# EAGLE board WSTL18P1 (EAGLE 7.7.0)
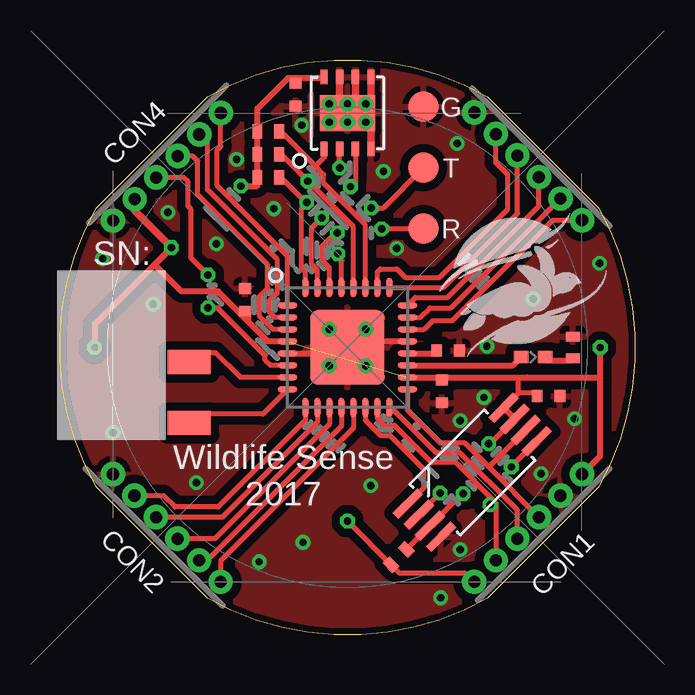
[diagram p0: board, top side]
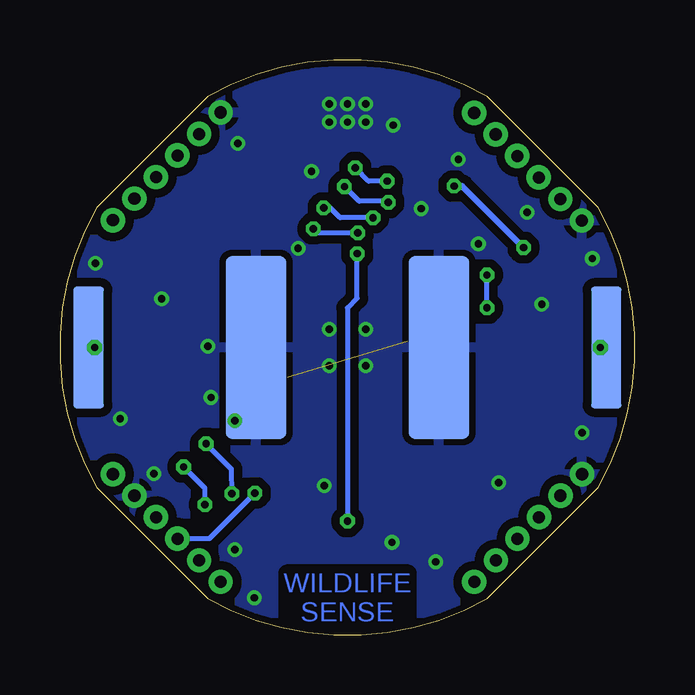
[diagram p1: board, bottom side, seen from below]

Size 23.98 x 23.98 mm. Coordinates in mm from the lower left corner, seen from the top.
Outline: 6.15,1.52 1.52,6.15 arc-59 1.52,17.83 6.15,22.45 arc-59 17.83,22.45 22.45,17.83 arc-59 22.45,6.15 17.83,1.52 arc-59 6.15,1.52
Copper layers (1*16): Top 0.035mm / dielectric 1.5mm / Bottom 0.035mm
Design rules "Nikos-SeeedStudio_2layer_DRU_no_angle_20140221": minimum track width 6mil, minimum drill 12mil, track to track 6mil, track to pad 6mil, pad to pad 6mil, via to via 6mil, smd to smd 0mil, copper to edge 10mil, drill to drill 10mil, minimum pad ring 10mil, minimum via ring 6mil, stop-mask expansion 0mil, vias tented up to drill 100mil, thermal gap 10mil
Net classes: 1 GND: width 0.254 mm, drill 0.305 mm, clearance 0.356 mm; 2 Signal: width 0.203 mm, drill 0.305 mm, clearance 0.203 mm

## Footprints (pad centres in the part's own frame; a part is rotated, then mirrored left to right if it is on the bottom)
CR2032-LINX-M = smd 1.27 x 5.08: BATT1 -10.795,0; BATT2 10.795,0 | smd 2.54 x 7.62: GND 3.81,0; GND1 -3.81,0
CAP_0402 = smd 0.45 x 0.5: 1 -0.475,0; 2 0.475,0
1X6_1.27_ROUND = drill 0.508 pad 0.813: 1 0,0; 2 1.27,0; 3 2.54,0; 4 3.81,0; 5 5.08,0; 6 6.35,0
LED_0402 = smd 0.6 x 0.5: ANODE -0.5,0; CATHODE 0.5,0
ATMEGA328PB_VFQFN32 = smd 0.8 x 0.25: 1 -2.5,1.75; 2 -2.5,1.25; 3 -2.5,0.75; 4 -2.5,0.25; 5 -2.5,-0.25; 6 -2.5,-0.75; 7 -2.5,-1.25; 8 -2.5,-1.75; 17 2.5,-1.75; 18 2.5,-1.25; 19 2.5,-0.75; 20 2.5,-0.25; 21 2.5,0.25; 22 2.5,0.75; 23 2.5,1.25; 24 2.5,1.75 | smd 0.25 x 0.8: 9 -1.75,-2.5; 10 -1.25,-2.5; 11 -0.75,-2.5; 12 -0.25,-2.5; 13 0.25,-2.5; 14 0.75,-2.5; 15 1.25,-2.5; 16 1.75,-2.5; 25 1.75,2.5; 26 1.25,2.5; 27 0.75,2.5; 28 0.25,2.5; 29 -0.25,2.5; 30 -0.75,2.5; 31 -1.25,2.5; 32 -1.75,2.5 | smd 3.1 x 3.1: PAD 0,0
TSSSOP-8 = smd 1.45 x 0.35: 1 -2.825,0.975; 2 -2.825,0.325; 3 -2.825,-0.325; 4 -2.825,-0.975; 5 2.825,-0.975; 6 2.825,-0.325; 7 2.825,0.325; 8 2.825,0.975
RES_0402 = smd 0.4 x 0.6: 1 -0.45,0; 2 0.45,0
ABS07AIG = smd 1.8 x 1: P$1 0,1.275; P$2 0,-1.275
MAX30205_TDFN8 = smd 0.6 x 0.3: 1 -1.5,0.975; 2 -1.5,0.325; 3 -1.5,-0.325; 4 -1.5,-0.975; 5 1.5,-0.975; 6 1.5,-0.325; 7 1.5,0.325; 8 1.5,0.975 | smd 1.5 x 2.3: PAD 0,0
3_PIN_0.1INCH_POGO_PADS = smd 1.27 x 1.27: 1 0,0; 2 -2.54,0; 3 -5.08,0

## Placement (x,y rotation side)
BAT  LINX-CR2032-BAT-HLD-001-M  [CR2032-LINX-M]  11.99,11.99 0 bottom
C1  0.1uF  [CAP_0402]  7.72,13.97 90 top
C2  0.1uF  [CAP_0402]  15.93,10.16 270 top
C3  0.1uF  [CAP_0402]  16.18,11.86 0 top
C4  0.1uF  [CAP_0402]  9.83,22.53 270 top
C5  0.1uF  [CAP_0402]  20.37,9.96 0 top
CON1  1X6CONN-1.27-ROUND  [1X6_1.27_ROUND]  21.77,6.71 225 top
CON2  1X6CONN-1.27-ROUND  [1X6_1.27_ROUND]  2.21,6.71 315 top
CON3  1X6CONN-1.27-ROUND  [1X6_1.27_ROUND]  21.77,17.3 135 top
CON4  1X6CONN-1.27-ROUND  [1X6_1.27_ROUND]  6.71,21.77 225 top
LED0  LED_0402  [LED_0402]  19.74,11.58 0 top
MCU  ATMEGA328PBVQFN32  [ATMEGA328PB_VFQFN32]  11.99,11.99 0 top
MEM  AT25DN512C-XMHF-B  [TSSSOP-8]  17.2,6.78 45 top
R1  10k  [RES_0402]  14.12,3.25 225 top
R2  4.7k  [RES_0402]  8.69,21.01 0 top
R3  4.7k  [RES_0402]  8.69,20.04 0 top
R4  4.7k  [RES_0402]  8.69,19.07 0 top
R5  1k  [RES_0402]  21.39,11.99 90 top
T1  ABS07AIG  [ABS07AIG]  5.38,10.11 0 top
TMP  MAX30205  [MAX30205_TDFN8]  11.99,21.77 90 top
U$1  3_PIN_0.1_INCH_POGO_CONN  [3_PIN_0.1INCH_POGO_PADS]  15.16,16.94 270 top

## Library data of the parts
BAT = Battery_holders
C1-C5 LED0 R1-R5 = Passives
CON1-CON4 = AVR_ISP_127
MCU = ATMEGA328PB
MEM = Memory
T1 = ABS07AIG
TMP = MAX30205
U$1 = Connectors

## Nets
GND [GND]: BAT.GND BAT.GND1 C1.2 C2.2 C3.2 C4.2 C5.2 CON1.2 CON2.1 CON3.6 CON4.6 MCU.5 MCU.21 MCU.PAD MEM.4 R5.2 TMP.4 TMP.5 TMP.6 TMP.7 TMP.PAD U$1.3
MEM_CS [Signal]: MCU.14 MEM.1
MISO0 [Signal]: CON1.4 MCU.16 MEM.2
MOSI0 [Signal]: CON1.5 MCU.15 MEM.5
N$1 [Signal]: MCU.8 T1.P$2
N$2 [Signal]: MCU.7 T1.P$1
N$3: C3.1 MCU.20
N$4: LED0.CATHODE R5.1
PB0: CON2.5 MCU.12
PB1: CON2.6 MCU.13
PC0: CON3.2 MCU.23
PC1: CON3.3 MCU.24
PC2: CON3.4 MCU.25
PC3: CON3.5 MCU.26
PD3: CON4.1 MCU.1
PD4: CON4.2 MCU.2
PD5: CON2.2 MCU.9
PD6: CON2.3 MCU.10
PD7: CON2.4 MCU.11
PE0: CON4.3 MCU.3
PE1: CON4.4 MCU.6
PE2: LED0.ANODE MCU.19
PE3: CON3.1 MCU.22
RESET [Signal]: CON1.6 MCU.29 R1.2
RXD0 [Signal]: MCU.30 U$1.1
SCK0 [Signal]: CON1.3 MCU.17 MEM.6
SCL0 [Signal]: MCU.28 R3.2 TMP.2
SDA0 [Signal]: MCU.27 R2.2 TMP.1
TMP_INT: MCU.32 R4.2 TMP.3
TXD0 [Signal]: MCU.31 U$1.2
VCC: BAT.BATT1 BAT.BATT2 C1.1 C2.1 C4.1 C5.1 CON1.1 CON4.5 MCU.4 MCU.18 MEM.3 MEM.7 MEM.8 R1.1 R2.1 R3.1 R4.1 TMP.8

## Tracks (layer width: path | path; a pad name or v marks a point on that pad's centre or on a via)
GND  (via drill 0.3)
  Top 0.254: MCU.5 11.23,11.74 | 11.23,11.74 v11.23,11.23 | MCU.21 12.75,12.24 v12.75,12.75 | 11.23,11.74 11.48,11.99 MCU.PAD
  Top 0.305: TMP.4 12.96,21.39 v12.75,21.39 | TMP.5 12.96,22.15 v12.75,22.15 | TMP.6 12.31,22.15 v11.99,22.15 | TMP.7 11.66,22.15 v11.23,22.15
  other vias: 2.21,8.43 11.23,21.39 11.99,21.39 19.74,14.02 16.69,8.94 22.5,15.49 16.56,20.5 10.08,21.26 1.78,15.7 7.37,19.84 11.23,12.75 12.75,11.23 5.69,6.35 13.49,19.33 6.53,16.31 10.13,3.86 8.91,17.78 21.46,9.02 17.8,12.04 14.05,16.13 16.69,3.56 20.07,6.73 15.87,1.55 8.31,3.05 17.68,9.91 12.95,6.22 3.89,13.79 4.5,17.63
  pour Bottom: -1.22,-1.22 25.96,-1.22 25.96,26.59 -1.22,26.59
  pour Top: -1.22,-1.22 25.32,-1.22 25.32,26.21 -1.22,26.21
MEM_CS
  Top 0.203: MCU.14 12.74,8.95 13.36,8.33 13.77,8.33 15.16,6.93 15.16,6.13 MEM.1
MISO0  (via drill 0.3)
  Top 0.203: 13.78,9.49 MCU.16 13.8,9.49 15.7,7.59 16.69,7.59 19.07,5.21 CON1.4 | MEM.2 15.85,5.89 v15.85,5.92
  Bottom 0.203: v15.85,5.92 17.76,4.01 CON1.4
MOSI0  (via drill 0.3)
  Top 0.203: MCU.15 13.24,9.04 13.54,8.74 13.94,8.74 15.49,7.19 16.51,7.19 18.1,5.6 | CON1.5 18.18,5.52 18.1,5.6 | MEM.5 18.82,7.03 v18.82,7.01 | v17.93,5.44 18.1,5.6
  Bottom 0.203: v17.93,5.44 17.93,6.12 v18.82,7.01
N$1
  Top 0.203: MCU.8 8.46,9.21 5.38,9.21 T1.P$2
N$2
  Top 0.203: MCU.7 7.52,10.74 6.5,11.76 5.38,11.76 T1.P$1
N$3
  Top 0.254: MCU.20 15.54,11.74 C3.1
N$4
  Top 0.254: LED0.CATHODE 20.24,11.46 21.39,11.46 R5.1
PB0
  Top 0.203: MCU.12 11.74,8.72 6.14,3.11 CON2.5
PB1
  Top 0.203: MCU.13 12.24,8.63 6.7,3.09 CON2.6
PC0
  Top 0.203: MCU.23 15.02,13.24 15.42,13.64 16.31,13.64 CON3.2
PC1
  Top 0.203: MCU.24 14.82,14.07 16.15,14.07 19.97,17.89 CON3.3
PC2
  Top 0.203: MCU.25 15.99,14.49 19.07,17.57 CON3.4
PC3
  Top 0.203: MCU.26 13.24,15.14 13.36,15.27 14.05,15.27 14.4,14.91 15.82,14.91 18.67,17.75 18.67,19.2 18.18,19.7 CON3.5
PD3
  Top 0.203: MCU.1 9.49,15.81 6.55,18.74 6.55,20.22 6.71,20.37 CON4.1
PD4
  Top 0.203: MCU.2 8.96,13.24 8.74,13.46 8.74,13.94 9.07,14.27 9.07,15.65 6.15,18.57 6.15,20.53 CON4.2
PD5
  Top 0.203: MCU.9 10.24,8.97 6.6,5.33 4.8,5.33 4.33,5.81 CON2.2
PD6
  Top 0.203: MCU.10 10.74,8.88 6.76,4.91 CON2.3
PD7
  Top 0.203: MCU.11 11.24,8.8 6.45,4.01 CON2.4
PE0
  Top 0.203: MCU.3 8.88,12.74 8.33,13.28 8.33,14.12 8.66,14.45 8.66,15.44 5.74,18.36 5.74,19.76 5.53,19.97 CON4.3
PE1  (via drill 0.3)
  Top 0.203: MCU.6 8.78,11.24 8.56,11.46 8.56,11.66 6.58,13.64 v6.17,13.64 | CON4.4 5.16,19.07 5.33,18.9 5.33,17.88 5.46,17.75 5.46,15.72 v6.17,15.01
  Bottom 0.203: v6.17,13.64 v6.17,15.01
PE2
  Top 0.254: 19.24,11.69 LED0.ANODE 18.89,11.24 MCU.19
PE3
  Top 0.203: MCU.22 15.18,12.74 15.54,13.11 16.36,13.11 20.55,17.3 CON3.1
RESET  (via drill 0.3)
  Top 0.203: MCU.29 11.73,15.75 v11.58,15.9 | v11.99,4.75 R1.2 14.15,2.59 16.9,2.59 CON1.6
  Top 0.254: MCU.29
  Bottom 0.203: v11.99,4.75 11.99,13.64 11.58,14.05 v11.58,15.9
RXD0  (via drill 0.3)
  Top 0.203: MCU.30 11.24,15.33 10.92,15.65 10.92,16.2 11.48,16.76 v11.56,16.76 11.51,16.76 | v13.41,16.94 U$1.1
  Bottom 0.203: v11.56,16.76 13.23,16.76 v13.41,16.94
SCK0
  Top 0.203: MCU.17 14.49,9.39 15.87,8 16.88,8 17.9,6.98 | CON1.3 17.9,6.98 | MEM.6 17.9,7.03 17.9,6.98
SCL0  (via drill 0.3)
  Top 0.203: MCU.28 12.24,17.02 v10.34,18.92 9.22,20.04 R3.2 | v11.66,19.48 TMP.2
  Bottom 0.203: v10.34,18.92 11.1,18.92 v11.66,19.48
SDA0
  Top 0.203: MCU.27 12.74,17.11 11,18.85 11,19.2 10.65,19.55 | TMP.1 11.01,19.9 10.65,19.55 | 10.65,19.55 9.19,21.01 R2.2
TMP_INT  (via drill 0.3)
  Top 0.203: MCU.32 10.24,15.14 10.08,15.29 10.08,17.81 v10.29,18.03 10.26,18.03 9.22,19.08 R4.2 | TMP.3 12.31,18.89 v12.12,18.69
  Bottom 0.203: v10.29,18.03 10.34,18.08 11.51,18.08 v12.12,18.69 11.79,18.36
TXD0  (via drill 0.3)
  Top 0.203: MCU.31 10.74,15.22 10.49,15.47 10.49,16.97 v10.92,17.4 | v12.98,17.81 13.49,17.81 U$1.2
  Bottom 0.203: v10.92,17.4 12.29,17.4 12.7,17.81 v12.98,17.81
VCC  (via drill 0.3)  (1 unrouted)
  Top 0.203: C1.1 7.86,13.49 7.86,13.05 | MEM.7 17.93,7.98 v17.88,7.98 | C5.1 19.9,10.08 19.12,10.08 | 19.12,10.08 MEM.8 | 19.12,10.08 19.12,10.74 19.48,10.74 | v16.81,5.89 16.77,5.89 MEM.3 R1.1
  Top 0.254: MCU.4 8.67,12.24 7.86,13.05 6.6,14.33 5.08,14.33 3.95,15.46 | MCU.18 15.93,10.74 | C2.1 15.93,10.74 | TMP.8 10.96,23.22 9.83,23.22 | 9.83,23.22 9.5,23.22 8.24,21.95 R2.1 R3.1 R4.1 8.24,18.72 v7.54,18.72 | C4.1 9.83,23.22 | 15.93,10.74 19.48,10.74 22.53,10.74 | MEM.8 MEM.7 | 22.53,10.74 v22.53,11.99 | v4.65,16.15 3.95,15.46 | 3.95,15.46 1.45,12.95 v1.45,11.99 | CON1.1 22.53,7.47 22.53,10.72 22.53,10.74
  Top 0.305: CON4.5 3.11,17.69 v4.65,16.15
  Bottom 0.203: v17.88,7.98 16.84,6.93 v16.81,5.89
  Bottom 0.254: v4.65,16.15 7.21,18.72 v7.54,18.72 | v1.45,11.99 BAT.BATT2 | v22.53,11.99 BAT.BATT1

## Text on the board
Bottom: WILDLIFE / SENSE
tPlace: SN: | Wildlife Sense / 2017
tNames: G | T | R
tStop: WSTL18P1